# Altium PCB WF_AutoCar.PcbDoc (part 2 of 2)
Units mil, origin at the board's own origin, x right, y up, seen from the top; angles counter-clockwise.
Board outline 2600 x 3475 mil, 4 copper layers (Top Layer, InternalPlane1, POWER, Bottom Layer); 97 components, 133 nets, 458 pads, 431 vias.
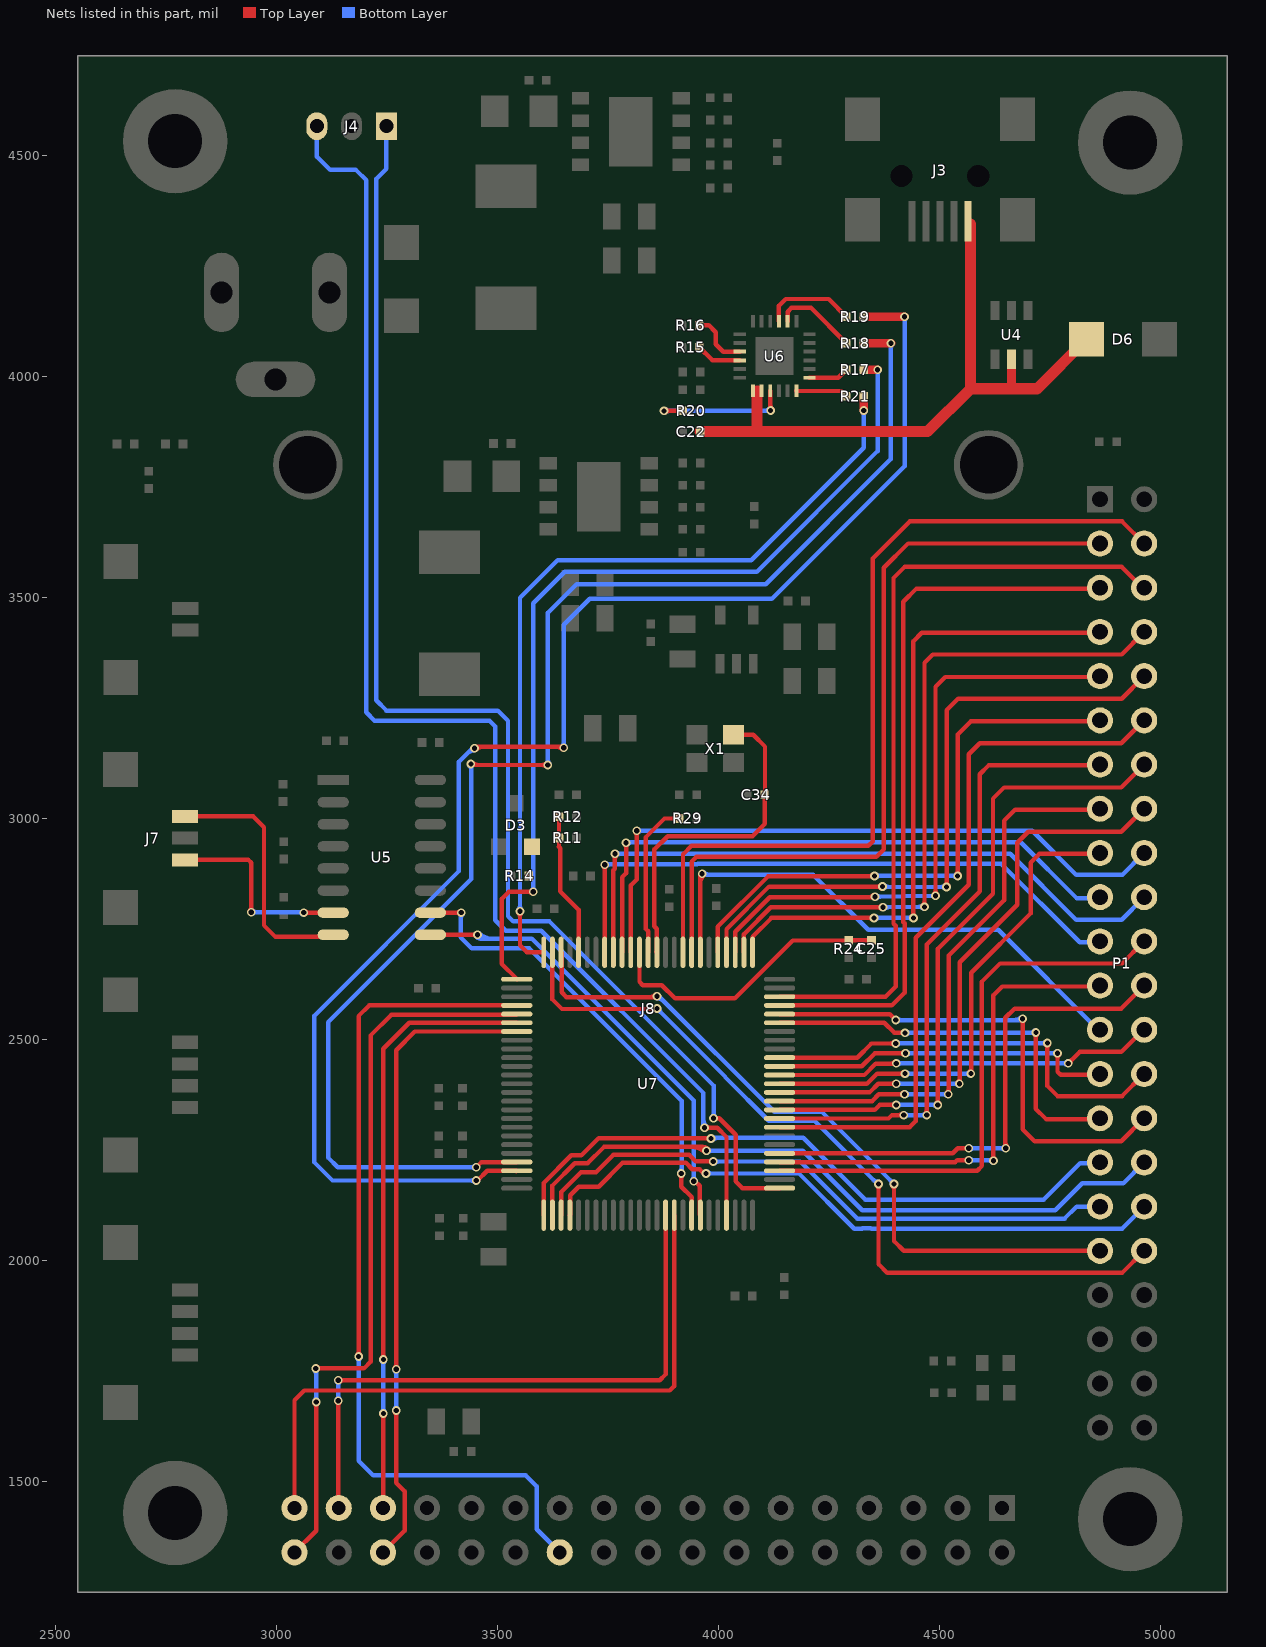
[diagram p4: the nets of this part, all layers, seen from the top]

## Via types
v1: diameter 19.68, hole 11.81, Top Layer to Bottom Layer, tented both sides, 429 vias
v2: diameter 20, hole 10, Top Layer to Bottom Layer, 2 vias

## Nets (pads, with @x,y where several pads share a name; then routed paths per layer and width w, separated by ;. In a path a pad name is that pad's centre, name@x,y a point inside that pad or via, vN(x,y) a via of type N, cw(c..) or ccw(c..) an arc to the next point about the centre after c; other vN are vias at no path point) (continued)
NetR15_2: R15.2 U6.4 | length 103.9
  Top Layer w10: R15.2@3955.68,4066 3985.43,4036.26 U6.4@4047.25,4036.26
NetR16_2: R16.2 U6.3 | length 132.3
  Top Layer w10: R16.2@3955.68,4116 3977,4116 3993,4100 3993,4073 4010.06,4055.94 U6.3@4047.25,4055.94
NetR17_1: R17.1 U6.13 | length 91.1
  Top Layer w10: U6.13@4204.73,3996.89 4270.2,3996.89 R17.1@4288.31,4015
NetR18_1: R18.1 U6.20 | length 191.1
  Top Layer w10: U6.20@4155.52,4124.84 4155.52,4146.52 4164,4155 4208.31,4155 R18.1@4288.31,4075
NetR19_1: R19.1 U6.21 | length 210.3
  Top Layer w10: U6.21@4135.83,4124.84 4135.83,4159.83 4151,4175 4248.31,4175 R19.1@4288.31,4135
NetR20_1: R20.1 U6.9 | length 386.1
  Top Layer w10: v1(3876,3922) R20.1@3918.32,3922 ; v1@3879.42,3918.58 cw(c3887.69,3910.31) 3887.69,3922 cw(c3887.69,3933.69) v1@3879.42,3925.42 ; 4116.15,3936.74 ccw(c4130.74,3936.74) v1@4120.42,3926.42 ; U6.9@4116.15,3967.36 4116.15,3923.85 v1(4117,3923)
  Bottom Layer w10: v1(3876,3922) v1@4115,3922 ; v1@3879.42,3918.58 cw(c3887.69,3910.31) 3887.69,3922 cw(c3887.69,3933.69) v1@3879.42,3925.42 ; 4102.9,3922 ccw(c4102.9,3937.11) v1@4113.58,3926.42
NetR21_1: R21.1 U6.12 | length 118.2
  Top Layer w10: U6.12@4175.2,3967.36 4175.57,3967 4276.31,3967 R21.1@4288.31,3955
NRST: C25.2 R24.2 U7.14 | length 651.8
  Top Layer w10: U7.14@3820.32,2697.24 3820.32,2630.68 3828,2623 3871,2623 3901,2593 4036,2593 4167,2724 R24.2@4284.69,2724 ; R24.2@4294,2724.68 C25.2@4345,2724.68
OSC_IN: C34.1 U7.12 X1.2 | length 773.4
  Top Layer w10: U7.12@3858.51,2698.42 U7.12@3859.68,2697.24 3859.68,2750.79 3854,2756.48 3854,2930 3884,2960 4076,2960 4103.69,2987.68 C34.1@4103.69,3054 ; X1.2@4033.34,3189.5 4077.5,3189.5 4104.31,3162.68 C34.1@4104.31,3048
OSC_OUT: R29.1 U7.13 | length 355.5
  Top Layer w10: U7.13@3840,2697.24 3840,2745.02 3835,2750.02 3835,2958 3877,3000 R29.1@3910.32,3000
PA0: P1.35 U7.23 | length 1691.5
  Top Layer w10: U7.23@3643.15,2697.24 3644.32,2696.07 3644.32,2606.68 3655,2596 v1@3855,2596 ; 3843.48,2596 ccw(c3843.48,2614.52) v1@3856.58,2601.42 ; v1@4392.58,2169.58 cw(c4384.31,2161.31) 4396,2161.31 cw(c4407.69,2161.31) v1@4399.42,2169.58 ; v1(4396,2173) 4396,2044 4418,2022 P1.35@4862,2022
  Bottom Layer w10: v1@3860,2593.16 cw(c3860,2571.08) 3875.61,2586.69 ; v1(3860,2598) 3860,2597 3865.3,2597 4125.3,2337 4232,2337 v1(4396,2173) ; v1@4391.16,2173 ccw(c4379.47,2173) 4387.73,2181.27 ccw(c4396,2189.53) v1@4396,2177.84
PA1: P1.36 U7.24 | length 1890.8
  Top Layer w10: U7.24@3623.46,2697.24 3623.46,2590.54 3645,2569 v1@3860,2569 ; 3845.89,2569 ccw(c3845.89,2584.11) v1@3856.58,2573.42 ; v1@4357.58,2169.58 cw(c4349.31,2161.31) 4361,2161.31 cw(c4372.69,2161.31) v1@4364.42,2169.58 ; v1(4361,2173) 4361,1992 4381,1972 4912,1972 P1.36@4962,2022
  Bottom Layer w10: v1@3860,2565.16 cw(c3860,2553.47) 3868.27,2561.73 cw(c3876.53,2570) v1@3864.84,2570 ; v1(3860,2570) 4015,2415 4015,2414 4113,2316 4216,2316 4359,2173 v1(4361,2173) ; 4349.32,2182.68 ccw(c4361,2194.36) v1@4361,2177.84
PB3: P1.26 U7.89 | length 932.7
  Top Layer w10: U7.89@4137.24,2419.68 4329.14,2419.68 4354.46,2445 4400,2445 v1(4401,2446) ; 4386.9,2445 ccw(c4386.9,2460.11) v1@4397.58,2449.42 ; v1(4790,2446) 4816,2472 4910,2472 4958,2520 P1.26@4960,2520 ; v1@4790,2450.84 ccw(c4790,2462.53) 4798.27,2454.27 ccw(c4806.53,2446) v1@4794.84,2446
  Bottom Layer w10: v1(4401,2446) 4401,2445 4402,2446 v1(4790,2446) ; v1@4404.42,2442.58 cw(c4412.69,2434.31) 4412.69,2446 cw(c4412.69,2457.69) v1@4404.42,2449.42 ; v1@4786.58,2442.58 ccw(c4778.31,2434.31) 4778.31,2446 ccw(c4778.31,2457.69) v1@4786.58,2449.42
PB4: P1.27 U7.90 | length 855.2
  Top Layer w10: U7.90@4137.24,2439.37 4323.37,2439.37 4352.84,2468.84 v1(4422,2468.84) ; v1@4418.58,2465.42 ccw(c4410.31,2457.15) 4410.31,2468.84 ccw(c4410.31,2480.53) v1@4418.58,2472.27 ; v1@4762.58,2465.58 cw(c4754.31,2457.31) 4766,2457.31 cw(c4777.69,2457.31) v1@4769.42,2465.58 ; v1(4766,2469) 4766,2427 4773,2420 P1.27@4860,2420
  Bottom Layer w10: v1(4422,2468.84) v1@4767.84,2468.84 ; v1@4425.42,2465.42 cw(c4433.69,2457.15) 4433.69,2468.84 cw(c4433.69,2480.53) v1@4425.42,2472.27 ; 4753.93,2468.84 ccw(c4753.93,2481.07) v1@4762.58,2472.42 ; 4754.69,2468.84 cw(c4754.69,2457.69) v1@4762.58,2465.58
PB5: P1.28 U7.91 | length 1036.4
  Top Layer w10: U7.91@4137.24,2459.06 4313.06,2459.06 4345,2491 v1(4400,2491) ; v1@4396.58,2487.58 ccw(c4388.31,2479.31) 4388.31,2491 ccw(c4388.31,2502.69) v1@4396.58,2494.42 ; v1@4739.58,2488.58 cw(c4730.93,2479.93) 4743.16,2479.93 ; 4743.16,2480.69 cw(c4754.31,2480.69) v1@4746.42,2488.58 ; v1@4743.16,2492 4743.16,2394.84 4766,2372 4912,2372 P1.28@4960,2420
  Bottom Layer w10: v1(4400,2491) 4400.69,2491.68 v1@4743.31,2491.68 ; v1@4403.42,2487.58 cw(c4413.34,2477.66) 4413.34,2491.68 ; v1@4403.42,2494.42 ccw(c4410.04,2501.04) 4410.04,2491.68 ; 4730.55,2491.69 ccw(c4730.55,2504.45) v1@4739.58,2495.42 ; 4732.07,2491.68 cw(c4732.07,2481.07) v1@4739.58,2488.58
  other v1: 4743,2492
PB8: P1.29 U7.95 | length 963.3
  Top Layer w10: U7.95@4137.24,2537.8 4374.2,2537.8 4397,2515 v1(4421,2515) ; v1@4713.58,2512.58 cw(c4705.31,2504.31) 4717,2504.31 cw(c4728.69,2504.31) v1@4720.42,2512.58 ; v1(4717,2516) 4717,2343 4740,2320 P1.29@4860,2320
  Bottom Layer w10: v1(4421,2515) v1@4717,2515 ; v1@4424.42,2511.58 cw(c4432.69,2503.31) 4432.69,2515 cw(c4432.69,2526.69) v1@4424.42,2518.42 ; 4702.9,2515 ccw(c4702.9,2530.11) v1@4713.58,2519.42
PB9: P1.30 U7.96 | length 1161.2
  Top Layer w10: U7.96@4137.24,2557.48 4386.52,2557.48 v1(4400,2544) ; v1@4683.58,2543.58 cw(c4675.31,2535.31) 4687,2535.31 cw(c4698.69,2535.31) v1@4690.42,2543.58 ; v1(4687,2547) 4687,2297 4714,2270 4910,2270 P1.30@4960,2320
  Bottom Layer w10: v1(4400,2544) v1@4684,2544 ; v1@4403.42,2540.58 cw(c4411.69,2532.31) 4411.69,2544 cw(c4411.69,2555.69) v1@4403.42,2547.42 ; 4668.07,2544 ccw(c4668.07,2565.93) v1@4683.58,2550.42
PB12: P1.31 U7.51 | length 1483.4
  Top Layer w10: U7.51@3603.78,2102.76 3603.78,2175.48 3666.3,2238 3689,2238 3728,2277 v1@3982,2277 ; 3967.89,2277 cw(c3967.89,2261.89) v1@3978.58,2272.58
  Bottom Layer w10: v1@3985.42,2272.58 cw(c3998.52,2259.48) 3998.52,2278 ; v1@3988,2278 4190.82,2278 4330.82,2138 4735,2138 4817,2220 P1.31@4860,2220
  other v1: 3982,2276
PB13: P1.32 U7.52 | length 1607.1
  Top Layer w10: U7.52@3623.46,2102.76 3623.46,2169.7 3673.76,2220 3703,2220 3740,2257 3963.32,2257 v1(3972,2248.32) ; 3939.34,2257 cw(c3939.34,2215.66) v1@3968.58,2244.89 ; 3963.48,2257 cw(c3963.48,2239.8) v1@3975.65,2251.96
  Bottom Layer w10: v1(3972,2248.32) 4189.69,2248.32 4324,2114 4761,2114 4822,2175 4915,2175 P1.32@4960,2220 ; v1@3975.42,2244.89 cw(c3983.69,2236.62) 3983.69,2248.32 cw(c3983.69,2260.01) v1@3975.42,2251.74
PB14: P1.33 U7.53 | length 1412.1
  Top Layer w10: U7.53@3643.15,2102.76 3643.15,2155.15 3688,2200 3722,2200 3761,2239 3932.91,2239 3947.23,2224.68 v1@3987,2224.68 ; 3973.66,2224.68 cw(c3973.66,2210.66) v1@3983.58,2220.58 ; 3976.96,2224.68 ccw(c3976.96,2234.04) v1@3983.58,2227.42
  Bottom Layer w10: v1(3987,2224) 4184,2224 4313,2095 4782,2095 4809,2122 4858,2122 P1.33@4860,2120 ; v1@3990.42,2220.58 cw(c3998.69,2212.31) 3998.69,2224 cw(c3998.69,2235.69) v1@3990.42,2227.42
PB15: P1.34 U7.54 | length 1469
  Top Layer w10: U7.54@3662.83,2102.76 3664.01,2103.93 3664.01,2148.01 3683,2167 3728,2167 3782,2221 3925.46,2221 3939.77,2206.68 3956.32,2206.68 v1@3967,2196
  Bottom Layer w10: v1(3971,2197) 4181,2197 4306,2072 4323.7,2072 4324.54,2072.84 4343.46,2072.84 4344.3,2072 4912,2072 P1.34@4960,2120 ; v1@3974.42,2193.58 cw(c3982.69,2185.31) 3982.69,2197 cw(c3982.69,2208.69) v1@3974.42,2200.42
PC0: P1.18 U7.15 | length 1523.5
  Top Layer w10: U7.15@3800.63,2697.24 3800.63,2848.63 3814,2862 v1(3814,2972) ; v1@3810.58,2968.58 cw(c3802.31,2960.31) 3814,2960.31 cw(c3825.69,2960.31) v1@3817.42,2968.58
  Bottom Layer w10: v1(3814,2972) 4709,2972 4808,2873 4913,2873 P1.18@4960,2920 ; v1@3817.42,2968.58 cw(c3825.69,2960.31) 3825.69,2972 cw(c3825.69,2983.69) v1@3817.42,2975.42
PC1: P1.19 U7.16 | length 1403.9
  Top Layer w10: U7.16@3780.94,2697.24 3780.94,2866.94 3790,2876 v1(3790,2945) ; v1@3786.58,2941.58 cw(c3778.31,2933.31) 3790,2933.31 cw(c3801.69,2933.31) v1@3793.42,2941.58
  Bottom Layer w10: v1@3790,2946 4683,2946 4809,2820 P1.19@4860,2820 ; v1@3793.42,2941.58 cw(c3804.11,2930.89) 3804.11,2946
PC2: P1.20 U7.17 | length 1537.8
  Top Layer w10: U7.17@3761.26,2697.24 3761.26,2882.81 3764.42,2885.96 v1@3764.42,2920 ; v1@3761.58,2916.58 cw(c3754.72,2909.72) 3764.42,2909.72 ; 3764.42,2906.9 cw(c3778.1,2906.9) v1@3768.42,2916.58
  Bottom Layer w10: v1(3765,2920) 4659,2920 4808,2771 4911,2771 P1.20@4960,2820 ; v1@3768.42,2916.58 cw(c3776.69,2908.31) 3776.69,2920 cw(c3776.69,2931.69) v1@3768.42,2923.42
PC3: P1.21 U7.18 | length 1427.8
  Top Layer w10: v1@3738.15,2892 cw(c3729.88,2883.73) 3741.57,2883.73 cw(c3753.27,2883.73) v1@3745,2892 ; U7.18@3741.57,2697.24 v1(3741.57,2895.43)
  Bottom Layer w10: v1@3741.57,2896 3950.7,2896 3952.54,2897.84 4638.16,2897.84 4816,2720 P1.21@4860,2720 ; v1@3745,2892 cw(c3754.65,2882.35) 3754.65,2896 ; v1@3745,2898.85 ccw(c3751.88,2905.73) 3751.88,2896
PC10: P1.22 U7.78 | length 1281.1
  Top Layer w10: U7.78@4137.24,2203.15 4584.15,2203.15 4595,2214 4595,2631 4636,2672 4912,2672 P1.22@4960,2720
PC11: P1.23 U7.79 | length 1172.7
  Top Layer w10: U7.79@4137.24,2222.83 4534.83,2222.83 4539,2227 v1(4565,2227) ; v1@4561.58,2223.58 ccw(c4553.31,2215.31) 4553.31,2227 ccw(c4553.31,2238.69) v1@4561.58,2230.42 ; v1@4617.58,2229.42 ccw(c4609.31,2237.69) 4621,2237.69 ccw(c4632.69,2237.69) v1@4624.42,2229.42 ; v1(4621,2226) 4621,2600 4641,2620 P1.23@4860,2620
  Bottom Layer w10: v1(4565,2227) v1@4620,2227 ; v1@4568.42,2223.58 cw(c4576.69,2215.31) 4576.69,2227 cw(c4576.69,2238.69) v1@4568.42,2230.42 ; 4606.9,2227 cw(c4606.9,2211.89) v1@4617.58,2222.58
PC12: P1.24 U7.80 | length 1201.5
  Top Layer w10: U7.80@4137.24,2242.52 4529.06,2242.52 4540.54,2254 v1(4565,2254) ; v1@4648,2254 4648,2549 4669,2570 4910,2570 P1.24@4960,2620 ; 4648,2268.11 ccw(c4663.1,2268.11) v1@4652.42,2257.42
  Bottom Layer w10: v1(4565,2254) v1(4649,2254) ; v1@4568.42,2250.58 cw(c4576.69,2242.31) 4576.69,2254 cw(c4576.69,2265.69) v1@4568.42,2257.42 ; v1@4645.58,2250.58 ccw(c4637.31,2242.31) 4637.31,2254 ccw(c4637.31,2265.69) v1@4645.58,2257.42
PC13: P1.25 U7.7 | length 1259.2
  Top Layer w10: U7.7@3958.11,2697.24 3958.11,2871.11 v1(3962,2875) ; 3958.11,2853.92 cw(c3983.08,2853.92) v1@3965.42,2871.58
  Bottom Layer w10: v1(3962,2875) 3962,2874 3963,2873 4213,2873 4338,2748 4632,2748 P1.25@4860,2520 ; v1@3965.42,2878.42 ccw(c3978.52,2891.52) 3978.52,2873
PC14: P1.3 U7.8 | length 1800.8
  Top Layer w10: U7.8@3939,2697.82 U7.8@3938.43,2697.24 3938.43,2902.43 3949,2913 4356,2913 4373,2930 4373,3567 4428,3622 P1.3@4862,3622
PC15: P1.4 U7.9 | length 1972.4
  Top Layer w10: U7.9@3918.74,2697.24 3918.74,2918.74 3938,2938 4338,2938 4348,2948 4348,3588 4432,3672 4912,3672 P1.4@4962,3622
PD2: P1.12 U7.83 | length 1633.5
  Top Layer w10: U7.83@4137.24,2301.57 4137.67,2302 4213,2302 ; 4227.7,2302 4213,2302 ; P1.12@4960,3220 4910,3170 4590,3170 4565,3145 4565,2850 4445,2730 4445,2315.54 4431.46,2302 4213,2302
PD3: P1.13 U7.84 | length 1508.5
  Top Layer w10: U7.84@4137.24,2321.26 4383.64,2321.26 4391.54,2329.16 4417.84,2329.16 v1(4418,2329) ; 4405.93,2329.16 cw(c4405.93,2316.93) v1@4414.58,2325.58 ; 4406.69,2329.16 ccw(c4406.69,2340.31) v1@4414.58,2332.42 ; v1@4466.58,2332.42 ccw(c4458.31,2340.69) 4470,2340.69 ccw(c4481.69,2340.69) v1@4473.42,2332.42 ; v1(4470,2329) 4470,2715 4590,2835 4590,3100 4610,3120 P1.13@4860,3120
  Bottom Layer w10: v1(4418,2329) v1(4470,2329) ; v1@4421.42,2325.58 cw(c4429.69,2317.31) 4429.69,2329 cw(c4429.69,2340.69) v1@4421.42,2332.42 ; v1@4466.58,2325.58 ccw(c4458.31,2317.31) 4458.31,2329 ccw(c4458.31,2340.69) v1@4466.58,2332.42
PD4: P1.14 U7.85 | length 1551.6
  Top Layer w10: U7.85@4137.24,2340.94 4352.94,2340.94 4364,2352 v1(4401,2352) ; v1@4397.58,2348.58 ccw(c4389.31,2340.31) 4389.31,2352 ccw(c4389.31,2363.69) v1@4397.58,2355.42 ; v1@4491.58,2355.42 ccw(c4483.31,2363.69) 4495,2363.69 ccw(c4506.69,2363.69) v1@4498.42,2355.42 ; v1(4495,2352) 4495,2705 4620,2830 4620,3045 4645,3070 4910,3070 P1.14@4960,3120
  Bottom Layer w10: v1(4401,2352) v1(4495,2352) ; v1@4404.42,2348.58 cw(c4412.69,2340.31) 4412.69,2352 cw(c4412.69,2363.69) v1@4404.42,2355.42 ; v1@4491.58,2348.58 ccw(c4483.31,2340.31) 4483.31,2352 ccw(c4483.31,2363.69) v1@4491.58,2355.42
PD5: P1.15 U7.86 | length 1351.2
  Top Layer w10: U7.86@4137.24,2360.63 4346.45,2360.63 4361.82,2376 v1(4420,2376) ; v1@4416.58,2372.58 ccw(c4408.31,2364.31) 4408.31,2376 ccw(c4408.31,2387.69) v1@4416.58,2379.42 ; v1@4515.58,2379.42 ccw(c4504.9,2390.11) 4520,2390.11 ; v1@4520,2376 4520,2690 4645,2815 4645,2995 4670,3020 P1.15@4860,3020
  Bottom Layer w10: v1(4420,2376) v1(4519,2376) ; v1@4423.42,2372.58 cw(c4431.69,2364.31) 4431.69,2376 cw(c4431.69,2387.69) v1@4423.42,2379.42 ; v1@4515.58,2372.58 ccw(c4507.31,2364.31) 4507.31,2376 ccw(c4507.31,2387.69) v1@4515.58,2379.42
PD6: P1.16 U7.87 | length 1396.8
  Top Layer w10: U7.87@4137.24,2380.32 4340.68,2380.32 4360.37,2400 v1(4401,2400) ; v1@4397.58,2396.58 ccw(c4389.31,2388.31) 4389.31,2400 ccw(c4389.31,2411.69) v1@4397.58,2403.42 ; v1@4540.58,2403.42 ccw(c4529.9,2414.11) 4545,2414.11 ; v1@4545,2400 4545,2675 4675,2805 4675,2945 4700,2970 4910,2970 P1.16@4960,3020
  Bottom Layer w10: v1(4401,2400) v1(4544,2400) ; v1@4404.42,2396.58 cw(c4412.69,2388.31) 4412.69,2400 cw(c4412.69,2411.69) v1@4404.42,2403.42 ; v1@4540.58,2396.58 ccw(c4532.31,2388.31) 4532.31,2400 ccw(c4532.31,2411.69) v1@4540.58,2403.42
PD7: P1.17 U7.88 | length 1205.1
  Top Layer w10: U7.88@4137.24,2400 4334.91,2400 4357.75,2422.84 v1(4420.84,2422.84) ; v1@4417.42,2419.42 ccw(c4409.15,2411.15) 4409.15,2422.84 ccw(c4409.15,2434.53) v1@4417.42,2426.27 ; v1@4566.58,2426.27 ccw(c4555.9,2436.95) 4571,2436.95 ; v1@4571,2422.84 4571,2651 4705,2785 4705,2900 4725,2920 P1.17@4860,2920
  Bottom Layer w10: v1(4420.84,2422.84) v1(4570,2422.84) ; v1@4424.27,2419.42 cw(c4432.53,2411.15) 4432.53,2422.84 cw(c4432.53,2434.53) v1@4424.27,2426.27 ; v1@4566.58,2419.42 ccw(c4558.31,2411.15) 4558.31,2422.84 ccw(c4558.31,2434.53) v1@4566.58,2426.27
PE0: P1.5 U7.97 | length 1635.2
  Top Layer w10: U7.97@4137.24,2577.17 4391.17,2577.17 4420,2606 4420,2762.7 4417.16,2765.54 4417.16,3490.16 4447,3520 P1.5@4860,3520
PE1: P1.6 U7.98 | length 1794.1
  Top Layer w10: U7.98@4137.24,2596.85 4376.85,2596.85 4400,2620 4400,2757.24 4395,2762.24 4395,3544 4420,3569 4911,3569 P1.6@4960,3520
PE2: P1.7 U7.1 | length 1573.1
  Top Layer w10: U7.1@4076.22,2697.24 4076.22,2732.4 4118.82,2775 4349,2775 v1@4351,2777 ; v1@4347.58,2771.58 ccw(c4339.31,2763.31) 4339.31,2775 ccw(c4339.31,2786.69) v1@4347.58,2778.42 ; v1@4436.58,2778.42 ccw(c4428.31,2786.69) 4440,2786.69 ccw(c4451.69,2786.69) v1@4443.42,2778.42 ; v1(4440,2775) 4440,3401 4459,3420 4520,3420 ; 4493,3420 4520,3420 ; P1.7@4860,3420 4520,3420
  Bottom Layer w10: v1@4352,2776 v1(4351,2775) v1(4440,2775) ; v1@4354.42,2771.58 cw(c4362.69,2763.31) 4362.69,2775 cw(c4362.69,2786.69) v1@4354.42,2778.42 ; v1@4436.58,2771.58 ccw(c4428.31,2763.31) 4428.31,2775 ccw(c4428.31,2786.69) v1@4436.58,2778.42
PE3: P1.8 U7.2 | length 1623.2
  Top Layer w10: U7.2@4056.54,2697.24 4056.54,2738.17 4117.37,2799 v1(4371,2799) ; v1@4367.58,2795.58 ccw(c4359.31,2787.31) 4359.31,2799 ccw(c4359.31,2810.69) v1@4367.58,2802.42 ; v1@4461.58,2803.42 ccw(c4453.31,2811.69) 4465,2811.69 ccw(c4476.69,2811.69) v1@4468.42,2803.42 ; v1(4465,2800) 4465,3352 4484,3371 4911,3371 P1.8@4960,3420
  Bottom Layer w10: v1(4371,2799) v1(4465,2800) ; v1@4374.39,2802.46 ccw(c4382.57,2810.81) 4382.69,2799.12 ccw(c4382.81,2787.43) v1@4374.46,2795.61 ; v1@4461.54,2803.39 cw(c4453.19,2811.57) 4453.31,2799.88 cw(c4453.43,2788.19) v1@4461.61,2796.54
PE4: P1.9 U7.3 | length 1428.9
  Top Layer w10: U7.3@4036.85,2697.24 4036.85,2743.94 4114.91,2822 4353,2822 v1@4353,2821 ; 4338.9,2822 ccw(c4338.9,2837.11) v1@4349.58,2826.42 ; v1@4486.58,2828.42 ccw(c4478.31,2836.69) 4490,2836.69 ccw(c4501.69,2836.69) v1@4493.42,2828.42 ; v1(4490,2825) 4490,3298 4512,3320 P1.9@4860,3320
  Bottom Layer w10: v1(4353,2823) v1@4485,2825 ; v1@4356.37,2826.48 ccw(c4364.51,2834.87) 4364.69,2823.18 ccw(c4364.87,2811.49) v1@4356.48,2819.63
PE5: P1.10 U7.4 | length 1554.7
  Top Layer w10: U7.4@4017.17,2697.24 4017.17,2749.71 4113.46,2846 v1(4370,2846) v1@4372,2846 ; v1@4366.58,2842.58 ccw(c4358.31,2834.31) 4358.31,2846 ccw(c4358.31,2857.69) v1@4366.58,2849.42 ; v1@4511.58,2848.42 ccw(c4503.31,2856.69) 4515,2856.69 ccw(c4526.69,2856.69) v1@4518.42,2848.42 ; v1(4515,2845) 4515,3245 4541,3271 4595,3271 ; 4582,3271 4595,3271 ; P1.10@4960,3320 4911,3271 4595,3271
  Bottom Layer w10: v1(4370,2846) v1(4515,2845) ; v1@4373.4,2842.55 cw(c4381.61,2834.23) 4381.69,2845.92 cw(c4381.77,2857.61) v1@4373.45,2849.4 ; v1@4511.55,2841.6 ccw(c4503.23,2833.39) 4503.31,2845.08 ccw(c4503.39,2856.77) v1@4511.6,2848.45
PE6: P1.11 U7.5 | length 1361.2
  Top Layer w10: U7.5@3997.48,2697.24 3997.48,2755.48 4111,2869 v1@4351,2869 ; 4337.9,2869 ccw(c4337.9,2884.11) v1@4348.58,2873.42 ; v1@4536.58,2873.42 ccw(c4528.31,2881.69) 4540,2881.69 ccw(c4551.69,2881.69) v1@4543.42,2873.42 ; v1(4540,2870) 4540,3190 4570,3220 P1.11@4860,3220
  Bottom Layer w10: v1(4352,2870) v1@4535,2870 ; v1@4355.42,2866.58 cw(c4363.69,2858.31) 4363.69,2870 cw(c4363.69,2881.69) v1@4355.42,2873.42 ; v1@4536.58,2866.58 ccw(c4528.31,2858.31) 4528.31,2870 ccw(c4528.31,2881.69) v1@4536.58,2873.42
RS232_R: J7.3 U5.8 | length 580.3
  Top Layer w10: J7.3@2792.41,3004.61 2946.39,3004.61 2971,2980 2971,2758 2997,2732 3122.64,2732 U5.8@3127.64,2737
RS232_T: J7.1 U5.7 | length 517.2
  Top Layer w10: J7.1@2792.41,2906.18 2935.82,2906.18 2942,2900 v1(2942,2788) ; v1@2938.58,2791.42 ccw(c2930.31,2799.69) 2942,2799.69 ccw(c2953.69,2799.69) v1@2945.42,2791.42 ; v1(3061,2787) U5.7@3127.64,2787 ; v1@3064.42,2783.58 cw(c3072.69,2775.31) 3072.69,2787 cw(c3072.69,2798.69) v1@3064.42,2790.42
  Bottom Layer w10: v1(2942,2788) 3060,2788 v1(3061,2787) ; v1@2945.42,2784.58 cw(c2953.69,2776.31) 2953.69,2788 cw(c2953.69,2799.69) v1@2945.42,2791.42 ; 3046.89,2788 cw(c3046.89,2772.89) v1@3057.58,2783.58
SD_CS: J8.22 U7.29 | length 2008.1
  Top Layer w10: v1@3181.58,1786.42 ccw(c3173.31,1794.69) 3185,1794.69 ccw(c3196.69,1794.69) v1@3188.42,1786.42 ; v1(3185,1783) 3185,2553 3209.17,2577.17 U7.29@3542.76,2577.17
  Bottom Layer w10: v1@3181.58,1779.58 cw(c3173.31,1771.31) 3185,1771.31 cw(c3196.69,1771.31) v1@3188.42,1779.58 ; v1(3185,1783) 3185,1547 3218,1514 3563,1514 3588,1489 3588,1392 J8.22@3640,1340
SPI_CLK: J8.34 U7.30 | length 1722.3
  Top Layer w10: J8.34@3040,1340 3089,1389 v1(3089,1680) ; v1@3085.58,1676.58 cw(c3077.31,1668.31) 3089,1668.31 cw(c3100.69,1668.31) v1@3092.42,1676.58 ; v1(3088,1756) 3197,1756 3212,1771 3212,2509 3259.31,2556.31 3541.58,2556.31 U7.30@3542.76,2557.48 ; v1@3091.42,1752.58 cw(c3099.69,1744.31) 3099.69,1756 cw(c3099.69,1767.69) v1@3091.42,1759.42
  Bottom Layer w10: v1@3084.58,1752.58 cw(c3073.89,1741.89) 3089,1741.89 ; v1@3085.58,1683.42 ccw(c3077.31,1691.69) 3089,1691.69 ccw(c3100.69,1691.69) v1@3092.42,1683.42 ; v1(3089,1680) v1@3089,1756
SPI_MISO: J8.29 U7.31 | length 1437.6
  Top Layer w10: v1@3237.58,1650.58 cw(c3229.31,1642.31) 3241,1642.31 cw(c3252.69,1642.31) v1@3244.42,1650.58 ; v1@3237.58,1779.42 ccw(c3229.31,1787.69) 3241,1787.69 ccw(c3252.69,1787.69) v1@3244.42,1779.42 ; J8.29@3241,1441 v1(3241,1654) ; v1(3241,1776) 3241,2479 3299.8,2537.8 U7.31@3542.76,2537.8
  Bottom Layer w10: v1@3237.58,1657.42 ccw(c3229.31,1665.69) 3241,1665.69 ccw(c3252.69,1665.69) v1@3244.42,1657.42 ; v1@3237.58,1772.58 cw(c3229.31,1764.31) 3241,1764.31 cw(c3252.69,1764.31) v1@3244.42,1772.58 ; v1(3241,1654) v1(3241,1776)
SPI_MOSI: J8.30 U7.32 | length 1527.8
  Top Layer w10: J8.30@3240,1340 3289,1389 3289,1478 3270,1497 v1(3270,1661) ; v1@3266.58,1657.58 cw(c3258.31,1649.31) 3270,1649.31 cw(c3281.69,1649.31) v1@3273.42,1657.58 ; v1@3266.58,1757.42 ccw(c3258.31,1765.69) 3270,1765.69 ccw(c3281.69,1765.69) v1@3273.42,1757.42 ; v1(3270,1754) 3270,2476 3312.11,2518.11 U7.32@3542.76,2518.11
  Bottom Layer w10: v1@3266.58,1664.42 ccw(c3258.31,1672.69) 3270,1672.69 ccw(c3281.69,1672.69) v1@3273.42,1664.42 ; v1@3266.58,1750.58 cw(c3258.31,1742.31) 3270,1742.31 cw(c3281.69,1742.31) v1@3273.42,1750.58 ; v1(3270,1661) v1(3270,1754)
SWCLK: J4.1 U7.76 | length 3060.5
  Top Layer w10: v1(3988,2322) 4000.54,2322 4038,2284.54 4038,2179 4053.22,2163.78 U7.76@4137.24,2163.78
  Bottom Layer w10: J4.1@3248,4566 3248,4470 3224.61,4446.61 3224.61,3267.39 3248,3244 3500,3244 3523,3221 3523,2779 3534.84,2767.16 3616.84,2767.16 3988,2396 v1(3988,2322) ; v1@3984.58,2325.42 ccw(c3976.31,2333.69) 3988,2333.69 ccw(c3999.69,2333.69) v1@3991.42,2325.42
SWDIO: J4.3 U7.72 | length 3131.4
  Top Layer w10: v1(3967.54,2300.54) 3996,2300.54 4017.17,2279.38 U7.72@4017.17,2102.76 ; v1@3970.97,2297.12 cw(c3979.24,2288.85) 3979.24,2300.54 cw(c3979.24,2312.24) v1@3970.97,2303.97
  Bottom Layer w10: J4.3@3090.52,4566 3090.52,4497.27 3120.79,4467 3179,4467 3202,4444 3202,3240 3221,3221 3481,3221 3494,3208 3494,2770 3518,2746 3598,2746 3965,2379 3965,2303.09 v1(3967.54,2300.54) ; 3965,2318.38 ccw(c3985.38,2318.38) v1@3970.97,2303.97
T_CS: J8.33 U7.66 | length 1503
  Top Layer w10: J8.33@3040,1440 3040,1684 3062,1706 3889,1706 3899.06,1716.06 U7.66@3899.06,2102.76
T_PEN: J8.31 U7.65 | length 1469.2
  Top Layer w10: v1@3135.58,1679.58 cw(c3127.31,1671.31) 3139,1671.31 cw(c3150.69,1671.31) v1@3142.42,1679.58 ; J8.31@3139,1441 v1(3139,1683) ; v1(3139,1729) 3866,1729 3879.37,1742.37 U7.65@3879.37,2102.76 ; v1@3142.42,1725.58 cw(c3150.69,1717.31) 3150.69,1729 cw(c3150.69,1740.69) v1@3142.42,1732.42
  Bottom Layer w10: v1@3135.58,1686.42 ccw(c3127.31,1694.69) 3139,1694.69 ccw(c3150.69,1694.69) v1@3142.42,1686.42 ; v1@3135.58,1725.58 cw(c3127.31,1717.31) 3139,1717.31 cw(c3150.69,1717.31) v1@3142.42,1725.58 ; J8.31@3139,1441 J8.31@3140,1440 ; v1(3139,1683) v1(3139,1729)
USART1_RX: U5.9 U7.69 | length 1106.6
  Top Layer w10: U5.9@3347.36,2737 v1@3457,2737 ; v1@3450.58,2733.58 ccw(c3442.31,2725.31) 3442.31,2737 ccw(c3442.31,2748.69) v1@3450.58,2740.42 ; v1@3943,2179 v1@3943.46,2179 ; v1(3943,2179.25) 3943.09,2179.34 v1@3943.46,2179 ; U7.69@3958.11,2102.76 3956.94,2103.93 3956.94,2169.06 3947,2179 v1@3943.46,2179
  Bottom Layer w10: v1@3450.35,2733.35 ccw(c3463.28,2746.28) 3463.28,2728 ; v1(3454,2737) 3463,2728 3577,2728 3943,2362 v1(3943,2179.25) ; v1@3457.42,2740.42 ccw(c3487.42,2770.42) 3487.42,2728 ; v1@3939.58,2182.67 ccw(c3931.31,2190.94) 3943,2190.94 ccw(c3954.69,2190.94) v1@3946.42,2182.67
USART1_TX: U5.10 U7.68 | length 1107.2
  Top Layer w10: U5.10@3347.36,2787 v1(3417,2787) ; v1@3413.58,2783.58 ccw(c3405.31,2775.31) 3405.31,2787 ccw(c3405.31,2798.69) v1@3413.58,2790.42 ; v1@3911.58,2193.58 cw(c3903.31,2185.31) 3915,2185.31 cw(c3926.69,2185.31) v1@3918.42,2193.58 ; v1(3915,2197) 3915,2167 3938.43,2143.57 U7.68@3938.43,2102.76
  Bottom Layer w10: 3416,2772.89 cw(c3431.11,2772.89) v1@3420.42,2783.58 ; v1@3416,2787 3416,2731 3441,2706 3571,2706 3915.84,2361.16 3915.84,2197.84 v1(3915,2197) ; v1@3911.58,2200.42 ccw(c3901.28,2210.72) 3915.84,2210.72
USART2_RX: R17.2 U7.26 | length 2118
  Top Layer w10: U7.26@3543.27,2636.73 3509,2671 3509,2818 3525,2834 v1(3580,2834) ; v1@3576.58,2830.58 ccw(c3568.31,2822.31) 3568.31,2834 ccw(c3568.31,2845.69) v1@3576.58,2837.42
  Top Layer w20: R17.2@4327.69,4015 v1(4359,4015)
  Bottom Layer w10: v1@3576.58,2837.42 ccw(c3568.31,2845.69) 3580,2845.69 ccw(c3591.69,2845.69) v1@3583.42,2837.42 ; v1(3580,2834) 3580,3487 3651,3558 4086,3558 4359,3831 v1(4359,4015) ; v1@4355.58,4011.58 cw(c4347.31,4003.31) 4359,4003.31 cw(c4370.69,4003.31) v1@4362.42,4011.58
USART2_TX: R21.2 U7.25 | length 1936.1
  Top Layer w10: v1@3546.58,2786.58 cw(c3538.31,2778.31) 3550,2778.31 cw(c3561.69,2778.31) v1@3553.42,2786.58 ; v1(3550,2790) 3550,2713 3565.76,2697.24 U7.25@3603.78,2697.24
  Top Layer w20: v1(4327.69,3923) R21.2@4327.69,3955
  Bottom Layer w10: v1@3546.58,2793.42 ccw(c3538.31,2801.69) 3550,2801.69 ccw(c3561.69,2801.69) v1@3553.42,2793.42 ; v1(3550,2790) 3550,3499 3635,3584 4073,3584 4327.69,3838.68 v1(4327.69,3923) ; v1@4324.26,3919.58 cw(c4315.99,3911.31) 4327.69,3911.31 cw(c4339.38,3911.31) v1@4331.11,3919.58
USART3_RX: R19.2 U7.48 | length 3512.5
  Top Layer w10: v1(3447,3159) 3447,3161 3448,3162 3647,3162 v1(3649,3160) ; v1@3450.42,3155.58 cw(c3465.93,3140.07) 3465.93,3162 ; v1(3451,2181) 3454,2181 3476.15,2203.15 U7.48@3542.76,2203.15 U7.48@3541.58,2201.98 ; 3632.48,3162 cw(c3632.48,3143.48) v1@3645.58,3156.58
  Top Layer w20: R19.2@4327.69,4135 v1(4420,4135)
  Bottom Layer w10: 3431.39,3147.69 cw(c3447,3132.08) v1@3447,3154.16 ; v1(3447,3159) 3442.7,3159 3412,3128.3 3412,2881 3085,2554 3085,2222 3126,2181 v1(3451,2181) ; v1@3447.58,2177.58 ccw(c3439.31,2169.31) 3439.31,2181 ccw(c3439.31,2192.69) v1@3447.58,2184.42 ; v1@3645.58,3163.42 ccw(c3637.31,3171.69) 3649,3171.69 ccw(c3660.69,3171.69) v1@3652.42,3163.42 ; v1(3649,3160) 3649,3438 3708,3497 4120,3497 4420,3797 v1(4420,4135) ; v1@4416.58,4131.58 cw(c4408.31,4123.31) 4420,4123.31 cw(c4431.69,4123.31) v1@4423.42,4131.58
USART3_TX: R18.2 U7.47 | length 3327.1
  Top Layer w10: v1(3439,3123) 3441,3121 v1(3613,3121) ; v1@3442.42,3126.42 ccw(c3455.52,3139.52) 3455.52,3121 ; v1(3451,2211) 3462.83,2222.83 U7.47@3542.76,2222.83 ; v1@3609.58,3117.58 ccw(c3601.31,3109.31) 3601.31,3121 ccw(c3601.31,3132.69) v1@3609.58,3124.42
  Top Layer w20: R18.2@4327.69,4075 v1(4389,4075)
  Bottom Layer w10: v1@3435.58,3119.58 cw(c3424.89,3108.89) 3440,3108.89 ; v1@3440,3123 3440,2863 3116,2539 3116,2233 3138,2211 v1(3451,2211) ; v1@3447.58,2207.58 ccw(c3439.31,2199.31) 3439.31,2211 ccw(c3439.31,2222.69) v1@3447.58,2214.42 ; v1@3609.58,3124.42 ccw(c3601.31,3132.69) 3613,3132.69 ccw(c3624.69,3132.69) v1@3616.42,3124.42 ; v1(3613,3121) 3613,3465 3678,3530 4106,3530 4389,3813 v1(4389,4075) ; v1@4385.58,4071.58 cw(c4377.31,4063.31) 4389,4063.31 cw(c4400.69,4063.31) v1@4392.42,4071.58
VBUS: C22.2 D6.1 J3.1 U4.5 U6.7 U6.8 | length 1513.7
  Top Layer w20: 4662,3977 U4.5@4662,4038.88
  Top Layer w25: C22.2@3957.68,3875 4472,3875 4569,3972 ; 4087,3878 4086.66,3878.34 4086.66,3967.02 4087,3967.36 ; J3.1@4569,4344.94 4569,3972 ; 4635,3972 4719.32,3972 D6.1@4831.32,4084 ; 4662,3977 4657,3972 4569,3972
VREF_3V: D3.2 R11.1 R12.1 R14.2 U7.21 | length 325.2
  Top Layer w10: 3638.1,2935.79 3641,2932.89 3641,2835 3682.84,2793.16 3682.84,2697.57 U7.21@3682.52,2697.24 ; 3638.32,2936 R11.1@3638.32,2956 R12.1@3638.32,3004
pads on no net: J3.4 J3.MH1 J3.MH2 J8.27 J8.28 U4.4 U4.6 U5.11 U5.12 U5.13 U5.14 U6.1 U6.10 U6.11 U6.14 U6.15 U6.16 U6.17 U6.18 U6.19 U6.22 U6.23 U6.24 U7.99 X1.3 X1.4

## Polygon pours and split planes (outlines as drawn)
GND on Top Layer "Bottom Layer-No Net" (solid, remove dead copper): 2556,4725 2550,4719 2550,1257 5149,1257 5150,1258 5150,4725 2550,4725
GND on Bottom Layer "Bottom Layer-No Net" (solid, remove dead copper): 2555,4725 5150,4725 5150,1256 5144,1250 2550,1250 2550,4725
GND on InternalPlane1 (split plane): 5129.9,1270.1 2570.1,1270.1 2570.1,4704.9 5129.9,4704.9
3.3V on POWER (split plane): 5129.9,1803.64 3103.1,1803.64 3103.1,2995.84 3729.94,2993.9 3729.99,2993.91 3730.05,2993.9 3731.95,2994.1 3733.86,2994.28 3733.91,2994.29 3733.97,2994.3 3735.79,2994.86 3737.63,2995.41 3737.68,2995.44 3737.74,2995.45 3739.41,2996.35 3741.11,2997.26 3741.16,2997.29 3741.21,2997.32 3742.68,2998.53 3744.17,2999.75 3744.2,2999.79 3744.25,2999.82 3745.45,3001.3 3746.68,3002.78 3746.7,3002.83 3746.74,3002.88 3747.63,3004.56 3748.54,3006.25 3748.56,3006.31 3748.59,3006.36 3749.14,3008.19 3749.7,3010.02 3749.7,3010.07 3749.72,3010.13 3749.9,3012.03 3750.1,3013.94 3750.09,3013.99 3750.1,3014.05 3748.99,3460.85 4430,3458.84 4431.11,3458.95 4460.53,3459.72 4462.22,3459.94 4463.92,3460.1 4464.18,3460.18 4464.44,3460.21 4466.06,3460.75 4467.69,3461.25 4467.93,3461.37 4468.18,3461.46 4469.66,3462.3 4471.17,3463.1 4471.37,3463.27 4471.6,3463.41 4472.89,3464.52 4474.21,3465.6 4474.38,3465.81 4474.58,3465.99 4475.63,3467.33 4476.71,3468.65 4476.84,3468.89 4477,3469.1 4477.76,3470.62 4478.57,3472.12 4478.64,3472.38 4478.76,3472.62 4479.22,3474.26 4479.71,3475.89 4479.74,3476.16 4479.81,3476.42 4479.93,3478.12 4480.1,3479.81 4480.1,3993.9 5129.9,3993.9
5V on POWER (split plane): 5129.9,4034.1 4460,4034.1 4456.08,4033.71 4452.31,4032.57 4448.83,4030.71 4445.79,4028.21 4443.29,4025.17 4441.43,4021.69 4440.29,4017.92 4439.9,4014 4439.9,3499.39 4426.92,3499.04 3728.9,3501.1 3728.85,3501.09 3728.79,3501.1 3726.89,3500.91 3724.98,3500.72 3724.93,3500.71 3724.87,3500.7 3723.05,3500.14 3721.21,3499.59 3721.16,3499.57 3721.11,3499.55 3719.42,3498.64 3717.73,3497.74 3717.68,3497.71 3717.64,3497.68 3716.16,3496.46 3714.67,3495.25 3714.64,3495.21 3714.6,3495.18 3713.39,3493.7 3712.17,3492.22 3712.14,3492.17 3712.1,3492.13 3711.21,3490.44 3710.3,3488.75 3710.28,3488.69 3710.26,3488.65 3709.71,3486.82 3709.14,3484.98 3709.14,3484.93 3709.12,3484.87 3708.94,3482.97 3708.75,3481.06 3708.75,3481.01 3708.75,3480.95 3709.85,3034.16 3083.06,3036.1 3083.03,3036.09 3083,3036.1 3081.07,3035.91 3079.14,3035.72 3079.11,3035.71 3079.08,3035.71 3077.23,3035.15 3075.37,3034.59 3075.34,3034.58 3075.31,3034.57 3073.6,3033.65 3071.89,3032.74 3071.86,3032.72 3071.83,3032.71 3070.34,3031.48 3068.83,3030.25 3068.81,3030.23 3068.79,3030.21 3067.56,3028.71 3066.32,3027.22 3066.31,3027.19 3066.29,3027.17 3065.37,3025.45 3064.46,3023.75 3064.45,3023.72 3064.43,3023.69 3063.87,3021.83 3063.3,3019.98 3063.3,3019.95 3063.29,3019.92 3063.1,3017.99 3062.9,3016.06 3062.91,3016.03 3062.9,3016 3062.9,1783.54 3063.29,1779.62 3064.43,1775.85 3066.29,1772.37 3068.79,1769.33 3071.83,1766.83 3075.31,1764.97 3079.08,1763.83 3083,1763.44 5129.9,1763.44 5129.9,1270.1 2570.1,1270.1 2570.1,3248.9 3313,3248.9 3316.92,3249.29 3320.69,3250.43 3324.17,3252.29 3327.21,3254.79 3333.81,3261.39 3336.31,3264.43 3338.16,3267.91 3339.31,3271.68 3339.69,3275.6 3339.69,3596.87 4245.04,3598.73 4248.96,3599.12 4252.73,3600.27 4256.2,3602.14 4257.6,3603.29 4258.09,3603.44 4261.56,3605.31 4264.59,3607.82 4267.08,3610.88 4268.93,3614.36 4270.05,3618.13 4270.42,3622.06 4266.14,4704.9 5129.9,4704.9
24V on POWER (split plane): 4230.16,3638.89 3339.69,3637.07 3339.69,3862.81 4101.37,3867.92 4101.55,3867.94 4101.75,3867.92 4103.51,3868.14 4105.28,3868.33 4105.47,3868.39 4105.65,3868.41 4107.34,3868.97 4109.05,3869.5 4109.21,3869.59 4109.39,3869.65 4110.94,3870.53 4112.51,3871.38 4112.65,3871.5 4112.82,3871.6 4114.17,3872.76 4115.54,3873.9 4115.66,3874.05 4115.8,3874.17 4116.89,3875.58 4118.01,3876.96 4118.1,3877.13 4118.22,3877.28 4119.02,3878.87 4119.85,3880.45 4119.9,3880.63 4119.99,3880.8 4120.46,3882.52 4120.97,3884.23 4120.98,3884.42 4121.03,3884.6 4121.16,3886.38 4121.33,3888.15 4121.31,3888.34 4121.32,3888.53 4106.09,4482.52 4105.88,4484.2 4105.72,4485.89 4105.64,4486.15 4105.6,4486.42 4105.07,4488.03 4104.58,4489.66 4104.45,4489.9 4104.36,4490.16 4103.53,4491.64 4102.73,4493.14 4102.55,4493.35 4102.42,4493.59 4101.31,4494.88 4100.23,4496.19 4100.02,4496.36 4099.84,4496.57 4098.5,4497.61 4097.19,4498.69 4096.95,4498.82 4096.73,4498.99 4095.21,4499.75 4093.72,4500.56 4093.46,4500.64 4093.21,4500.76 4091.57,4501.21 4089.95,4501.7 4089.68,4501.73 4089.41,4501.8 4087.72,4501.93 4086.03,4502.1 3381.28,4503.14 3381.26,4503.13 3381.25,4503.14 3379.32,4502.95 3377.36,4502.76 3377.34,4502.75 3377.33,4502.75 3375.46,4502.18 3373.59,4501.62 3373.57,4501.61 3373.56,4501.61 3371.83,4500.69 3370.11,4499.77 3370.1,4499.76 3370.08,4499.75 3368.56,4498.5 3367.06,4497.27 3367.05,4497.26 3367.04,4497.25 3365.78,4495.72 3364.56,4494.23 3364.55,4494.22 3364.54,4494.2 3363.61,4492.47 3362.69,4490.76 3362.69,4490.74 3362.68,4490.73 3362.11,4488.85 3361.54,4486.99 3361.54,4486.97 3361.54,4486.96 3361.35,4485.02 3361.15,4483.07 3361.15,4483.05 3361.15,4483.04 3361.15,4164.94 3360.9,4162.41 3360.9,4094.1 2860,4094.1 2856.08,4093.71 2852.31,4092.57 2848.83,4090.71 2845.79,4088.21 2843.29,4085.17 2841.43,4081.69 2840.29,4077.92 2839.9,4074 2839.9,3765.29 2570.1,3767.9 2570.1,4704.9 4225.95,4704.9
12V on POWER (split plane): 4066.41,4461.93 4080.62,3907.97 3319.46,3902.87 3317.58,3902.67 3315.68,3902.48 3315.61,3902.46 3315.55,3902.45 3313.73,3901.89 3311.91,3901.34 3311.85,3901.3 3311.78,3901.28 3310.11,3900.38 3308.43,3899.48 3308.38,3899.44 3308.32,3899.4 3306.86,3898.19 3305.39,3896.98 3305.34,3896.93 3305.29,3896.88 3304.09,3895.4 3302.89,3893.93 3302.86,3893.87 3302.81,3893.82 3301.93,3892.14 3301.03,3890.46 3301.01,3890.39 3300.98,3890.34 3300.44,3888.51 3299.89,3886.69 3299.88,3886.62 3299.86,3886.56 3299.69,3884.66 3299.5,3882.77 3299.5,3621.54 3299.28,3620.81 3298.9,3616.89 3299.3,3612.97 3299.5,3612.3 3299.5,3289.1 2570.1,3289.1 2570.1,3727.71 2859.81,3724.9 2859.9,3724.91 2860,3724.9 2861.86,3725.09 2863.73,3725.25 2863.82,3725.28 2863.92,3725.29 2865.71,3725.83 2867.51,3726.36 2867.6,3726.4 2867.69,3726.43 2869.34,3727.31 2871,3728.18 2871.08,3728.24 2871.17,3728.29 2872.61,3729.48 2874.07,3730.65 2874.13,3730.73 2874.21,3730.79 2875.4,3732.24 2876.6,3733.67 2876.65,3733.76 2876.71,3733.83 2877.59,3735.49 2878.49,3737.13 2878.52,3737.22 2878.57,3737.31 2879.11,3739.1 2879.67,3740.89 2879.68,3740.99 2879.71,3741.08 2879.89,3742.95 2880.1,3744.81 2880.09,3744.9 2880.1,3745 2880.1,4053.9 3381,4053.9 3384.92,4054.29 3388.69,4055.43 3392.17,4057.29 3395.21,4059.79 3397.71,4062.83 3399.57,4066.31 3400.71,4070.08 3401.1,4074 3401.1,4160.13 3401.35,4162.66 3401.35,4462.91

## Keep-outs
Keep-Out Layer:
  the board outline again, w3.94

## Other copper
Top Layer:
  rectangle net GND: 2724,3508.17 2842.36,3648
  rectangle net VREF_3V: 3559,2860 3646,3002
  rectangle net GND: 3523,3044 3648,3064
  rectangle net 12V: 4010,4391 4031,4436
  rectangle net 12V: 3816,4251 4031,4393
  rectangle net 12V: 3566,4048 3865,4203
  rectangle net 12V: 3816,4048 3865,4393
  rectangle net GND: 2581,1639 2738,2085
  rectangle net GND: 2580,2199 2740,2645
  rectangle net GND: 2580,2758 2744,3153
  rectangle net GND: 2580,3280 2744,3648
  rectangle net NetC8_2: 3446,4379 3655,4543
  rectangle net NetC9_2: 3321,3553 3527,3718
  rectangle net GND: 3595,3639 3777,3668
  rectangle net GND: 3669,4464 3851,4493
  rectangle net GND: 3554,3421 3698,3668
  rectangle net 5V: 3377,3276 3775,3376
  rectangle net 5V: 3720,3276 3775,3564
  rectangle net NetC16_2: 3948,3912 3968,4020
  rectangle net VBUS: 4553,4306 4585,4396
  rectangle net 3.3V: 3887,3420 4016,3483
  rectangle net 5V: 3720,3525 4262,3564
  rectangle net 5V: 4222,3382 4320,3564
  rectangle net 5V: 4957,4044 5124,4123
  rectangle net 24V: 3242,4264 3322,4396
  rectangle net 12V: 3449,4048 3591,4203
  rectangle net 3.3V: 3409,2086 3521,2135
  rectangle net GND: 3889,3283 4050,3311
  rectangle net GND: 3836,3283 3949,3398
  rectangle net GND: 3667,4232 3778,4493
  rectangle net GND: 4286,4341 4366,4630
  rectangle net GND: 4635,4384 4714,4630
  rectangle net GND: 4286,4492 4713,4630
  rectangle net GND: 4286,4306 4445,4360
POWER (plane layer: these items are gaps in the copper):
  lines w40: 2550,3269 3313,3269 3319.6,3275.6 3319.6,3882.77 4101.23,3888.01 4086,4482 3381.25,4483.04 3381.25,4162.66 3381,4162.41 3381,4074 2860,4074 2860,3745 2550,3748 ; 3319,3616.93 4245,3618.82 ; 4246,4717 4250.33,3621.98 ; 4427.16,3478.95 4460,3479.81 4460,4014 5150,4014 ; 4430.06,3478.94 3728.84,3481 3730,3014 3083,3016 3083,1783.54 5149.88,1783.54

## Silkscreen, mask and mechanical layers (free items; w line width, h text height)
Top Overlay:
  lines w3.94: 2975,1315 2975,1270 2975,3910 4705,3910 4705,1270 4705,1310
  text "SWD" at 2912,4595 h30
  text "SWDIO" at 2970,4451 h30
  text "GND" at 3125,4449 h30
  text "SWCLK" at 3230,4448 h30
  text "DIO" at 3199,4334 h30 r90
  text "CLK" at 3238,4330 h30 r90
  text "12V" at 3481,3990 h30
  text "24V输入" at 2618,3944 h60
  text "GND" at 5030,3710 h30
  text "3.3" at 4724,3706 h30
  text "PC14" at 4705,3610 h30
  text "PC15" at 5019,3607 h30
  text "PE0" at 4720,3510 h30
  text "PE1" at 5030,3510 h30
  text "GND" at 2864,3484 h30
  text "PE2" at 4720,3410 h30
  text "PE3" at 5030,3410 h30
  text "12V" at 2866,3375 h30
  text "PE4" at 4720,3310 h30
  text "PE5" at 5030,3310 h30
  text "12V输出" at 2776,3288 h60
  text "5V" at 3550,3284 h30
  text "PE6" at 4720,3210 h30
  text "PD2" at 5030,3210 h30
  text "PD3" at 4720,3110 h30
  text "PD4" at 5030,3110 h30
  text "PD5" at 4720,3010 h30
  text "PD6" at 5030,3010 h30
  text "R" at 2863,2990 h30
  text "GND" at 2861,2942 h30
  text "PD7" at 4720,2910 h30
  text "PC0" at 5030,2910 h30
  text "T" at 2862,2891 h30
  text "PC1" at 4720,2810 h30
  text "PC2" at 5030,2810 h30
  text "RS232" at 2801,2764 h30
  text "PC3" at 4720,2710 h30
  text "PC10" at 5020,2710 h30
  text "PC11" at 4710,2610 h30
  text "PC12" at 5020,2610 h30
  text "PC13" at 4705,2510 h30
  text "PB3" at 5030,2510 h30
  text "GND" at 2851,2479 h30
  text "BOOT1" at 3297,2465 h30 r270
  text "B" at 2854,2430 h30
  text "PB4" at 4720,2410 h30
  text "PB5" at 5030,2410 h30
  text "A" at 2856,2380 h30
  text "3.3V" at 2856,2331 h30
  text "PB8" at 4720,2310 h30
  text "PB9" at 5030,2310 h30
  text "BOOT0" at 3293,2297 h30 r270
  text "PB12" at 4705,2210 h30
  text "PB13" at 5020,2210 h30
  text "编码器" at 2795,2206 h60
  text "PB14" at 4700,2110 h30
  text "PB15" at 5020,2110 h30
  text "PA0" at 4720,2010 h30
  text "PA1" at 5030,2010 h30
  text "GND" at 2854,1918 h30
  text "3.3" at 4720,1910 h30
  text "GND" at 5028,1908 h30
  text "后向" at 2840,1869 h60
  text "GND" at 2850,1821 h30
  text "3.3" at 4720,1810 h30
  text "GND" at 5030,1810 h30
  text "前向" at 2835,1760 h60
  text "5V" at 4740,1710 h30
  text "GND" at 5030,1710 h30
  text "5V" at 4740,1610 h30
  text "GND" at 5030,1610 h30